# Altium PCB PCB1.PcbDoc
Units mil, origin at the board's own origin, x right, y up, seen from the top; angles counter-clockwise.
Board outline 6000 x 4000 mil, 2 copper layers (Top Layer, Bottom Layer); 85 components, 77 nets, 403 pads, 0 vias.
Unrouted connection lines stored in the file: 173.
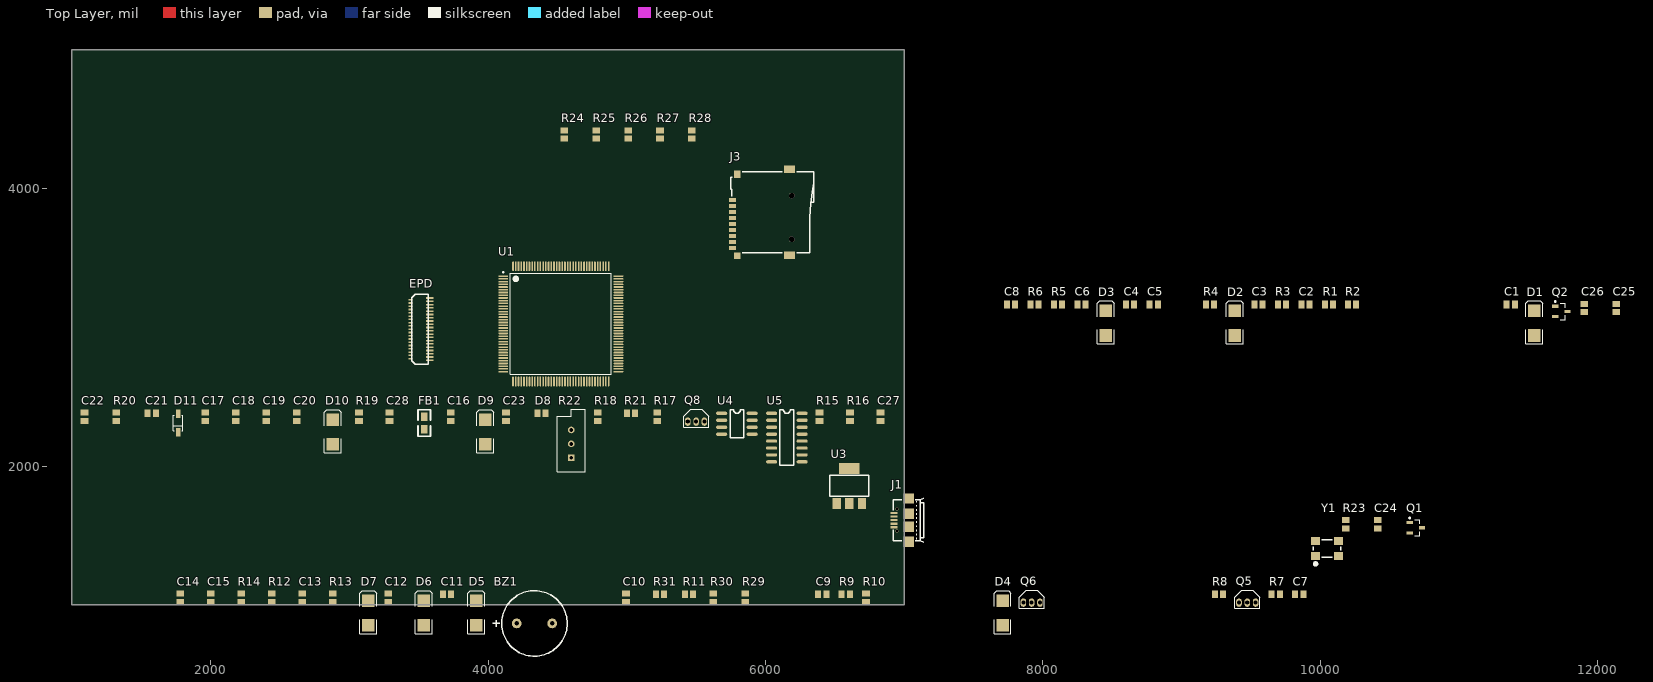
[diagram p0: Top Layer view]
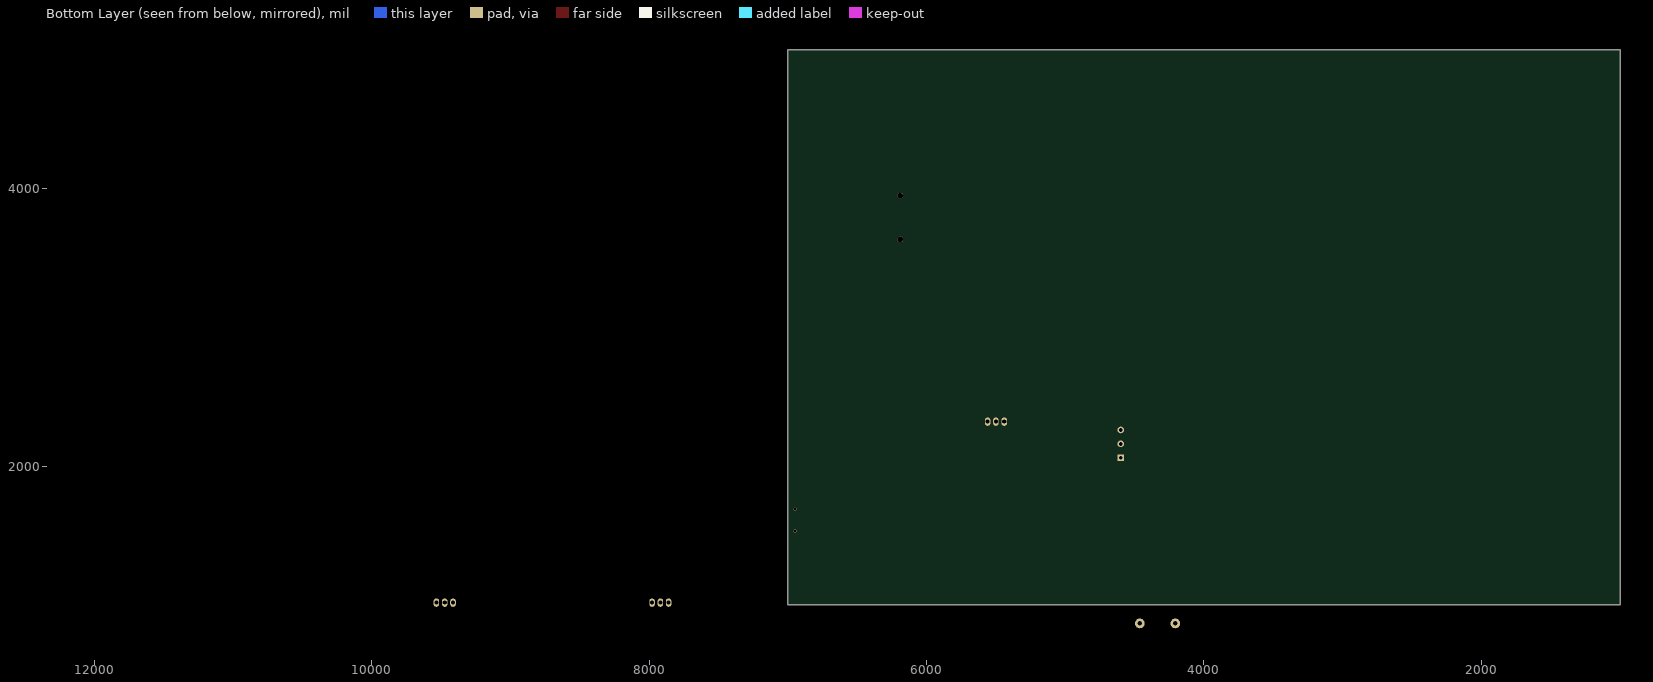
[diagram p1: Bottom Layer view, seen from below]

## Layer stack, top to bottom
Top Solder: solder mask 0.4, Solder Resist, Dk 3.5
Top Layer: signal copper 1.4
Dielectric 1: dielectric 12.6, FR-4, Dk 4.8
Bottom Layer: signal copper 1.4
Bottom Solder: solder mask 0.4, Solder Resist, Dk 3.5

## Board outline
1000,1000 7000,1000 7000,5000 1000,5000

## Design rules (kind name [scope] priority, off if disabled: settings)
Clearance [All] p1: gap=10 ignorepadtopadclearanceinfootprint=FALSE except(0: Arc-Hole Track-Hole SMDPad-Hole THPad-Hole Via-Hole Fill-Hole Poly-Hole Region-Hole Text-Hole)
PolygonConnect [All] p1: connectstyle=Relief reliefconductorwidth=10 reliefentries=4 polygonreliefangle="90 Angle" airgapwidth=10
RoutingVias [All] p1: holewidth=28 width=50 viastyle="Through Hole" minholewidth=28 minwidth=50 maxholewidth=28 maxwidth=50
SolderMaskExpansion [All] p1: expansion=4
Width [All] p1: maxlimit=10 minlimit=10 preferedwidth=10
30 further rules are at their usual default settings.

## Components (designator, comment, footprint, x,y, rotation, side; value= is the part's Value field where it differs from the comment)
BZ1 "BUZZER" BUZZER-D12.0X8.5-6.5-0.8 4335,865 r0 top
C1 "20pF" C0805 11375,3165 r0 top value=220pF
C2 "1uF" C0805 9895,3165 r0 top value=220pF
C3 "0.01uF" C0805 9555,3165 r0 top value=220pF
C4 "1uF" C0805 8630,3165 r0 top value=220pF
C5 "10uF" C0805 8800,3165 r0 top value=220pF
C6 "0.01uF" C0805 8280,3165 r0 top value=220pF
C7 "10uF" C0805 9850,1075 r0 top value=220pF
C8 "1uF" C0805 7770,3165 r0 top value=220pF
C9 "1uF" C0805 6410,1075 r0 top value=220pF
C10 "0.01uF" C0805 4995,1050 r90 top value=220pF
C11 "1uF" C0805 3705,1075 r0 top value=220pF
C12 "10uF" C0805 3280,1050 r90 top
C13 "220pF" C0805 2660,1050 r90 top
C14 "104" C0805 1780,1050 r90 top value=220pF
C15 "10uF" C0805 2000,1050 r90 top value=220pF
C16 "1uF" C0805 3730,2355 r90 top value=220pF
C17 "10uF" C0805 1960,2355 r90 top value=220pF
C18 "104" C0805 2180,2355 r90 top value=220pF
C19 "104" C0805 2400,2355 r90 top value=220pF
C20 "10uF" C0805 2620,2355 r90 top value=220pF
C21 "104" C0805 1575,2380 r0 top value=220pF
C22 "20pF" C0805 1090,2355 r90 top value=220pF
C23 "10uF" C0805 4130,2355 r90 top value=220pF
C24 "20pF" C0805 10415,1580 r90 top
C25 "20pF" C0805 12135,3140 r90 top
C26 "104" C0805 11905,3140 r90 top
C27 "104" C0805 6830,2355 r90 top value=220pF
C28 "104" C0805 3290,2355 r90 top
D1 "MBR0530" SMB 11545,3030 r90 top
D2 "MBR0530" SMB 9385,3030 r90 top
D3 "MBR0530" SMB 8455,3030 r90 top
D4 "MBR0530" SMB 7710,940 r90 top
D5 "MBR0530" SMB 3915,940 r90 top
D6 "ES2x" SMB 3535,940 r90 top
D7 "MBR0530" SMB 3135,940 r90 top
D8 "Green" C0805 4385,2380 r0 top
D9 "MBR0530" SMB 3980,2245 r90 top
D10 "MBR0530" SMB 2880,2245 r90 top
D11 "1N4148" 425 1765,2310 r90 top
EPD "BT" "39FXL - duplicate" 3580,2762.4 r90 top
FB1 "100uH" 0805 3540,2265 r90 top
J1 "MICRO USB CONNECTOR TYPEB" "MICRO USB CONNECTOR TYPEB-ST-MC-5F-01" 7090,1610 r90 top
J3 "MICRO SD CARD CONNECTOR" "MICRO SD CARD CONNECTOR" 6347.48,3829.92 r90 top
Q1 "PNP" SOT-23B_N 10690,1555 r0 top
Q2 "QNPN" SOT-23B_N 11740,3115 r0 top
Q5 "MMBT3904" TO-92B 9425,1015 r0 top
Q6 "MMBT3904" TO-92B 7870,1015 r0 top
Q8 "MMBT3904" TO-92B 5450,2320 r0 top
R1 "1M" C0805 10065,3165 r0 top
R2 "10K" C0805 10230,3165 r0 top
R3 "57.6K" C0805 9725,3165 r0 top
R4 "100K" C0805 9205,3165 r0 top
R5 "100K" C0805 8110,3165 r0 top
R6 "100K" C0805 7940,3165 r0 top
R7 "100K" C0805 9680,1075 r0 top
R8 "10K" C0805 9270,1075 r0 top
R9 "1M" C0805 6580,1075 r0 top
R10 "80.6K" C0805 6725,1050 r90 top
R11 "100K" C0805 5450,1075 r0 top
R12 "3k/1%" C0805 2440,1050 r90 top
R13 "10K/1%" C0805 2880,1050 r90 top
R14 "100K" C0805 2220,1050 r90 top
R15 "51R/1%" C0805 6390,2355 r90 top
R16 "10K/1%" C0805 6610,2355 r90 top
R17 "10K" C0805 5220,2355 r90 top
R18 "10K" C0805 4790,2355 r90 top
R19 "100K" C0805 3070,2355 r90 top
R20 "10K" C0805 1320,2355 r90 top
R21 "10R" C0805 5030,2380 r0 top
R22 "RPot" VR5 4600,2160 r90 top value=10K
R23 "10K" C0805 10185,1580 r90 top
R24 "47K" C0805 4550,4390 r90 top
R25 "47K" C0805 4780,4390 r90 top
R26 "47K" C0805 5010,4390 r90 top
R27 "47K" C0805 5240,4390 r90 top
R28 "47K" C0805 5470,4390 r90 top
R29 "0R" C0805 5855,1050 r90 top
R30 "22R" C0805 5625,1050 r90 top
R31 "22R" C0805 5240,1075 r0 top
U1 "STM32F407ZGT6" STM-LQFP144_N 4525,3025 r0 top
U3 "1117B" SOT-223 6514.45,1730 r0 top
U4 "LF353H(8)" SO-8 5685,2380 r0 top
U5 "CD4053" SO-16 6045,2380 r0 top
Y1 "25M" XTAL-5.0X3.2 10050,1405 r90 top

## Footprints (in the part's own frame and the unit in brackets; to place one, negate y for a bottom-side part, rotate by r counter-clockwise, add the part's x,y. Pads: shape width x height; smd on the part's side, far side on the other; paste and mask are expansions set on the pad)
"39FXL - duplicate" [mm]
  rect 0.3x1.35 smd: 1(0,0) 3(0.6,0) 5(1.2,0) 7(1.8,0) 9(2.4,0) 11(3,0) 13(3.6,0) 15(4.2,0) 17(4.8,0) 19(5.4,0) 21(6,0) 23(6.6,0) 25(7.2,0) 27(7.8,0) 29(8.4,0) 31(9,0) 33(9.6,0) 35(10.2,0) 37(10.8,0) 39(11.4,0)
  rect 0.3x0.75 smd: 1(0,0) 2(0.3,3.556) 2(0.3,3.556) 4(0.9,3.556) 6(1.5,3.556) 8(2.1,3.556) 10(2.7,3.556) 12(3.3,3.556) 14(3.9,3.556) 16(4.5,3.556) 18(5.1,3.556) 20(5.7,3.556) 22(6.3,3.556) 24(6.9,3.556) 26(7.5,3.556) 28(8.1,3.556) 30(8.7,3.556) 32(9.3,3.556) 34(9.9,3.556) 36(10.5,3.556) 38(11.1,3.556)
  silkscreen extent -0.76,0.25 12.06,3.3, body extent -1.15,0.27 12.55,3.28, height 0.9
425 [mm] "SOD-123; 2 Leads; Body 2.7 x 1.6 mm, (LxW)"
  rect 1.6x0.85 smd: 1(-1.7,0) 2(1.7,0)
  silkscreen extent -1.45,-0.9 1.45,0.9
0805 [mil]
  rect 60x50 smd: 1(0,0) 2(90,0)
  silkscreen extent -50,-45 140,45
BUZZER-D12.0X8.5-6.5-0.8 [mil] "Buzzer"
  round 70 hole 31.5: 1(-127.95,0) 2(127.95,0)
  silkscreen extent -299,-236 236,236, body extent -236,-236 236,236, height 339
C0805 [mm] "Chip Capacitor, Body 2.0x1.3mm, IPC High Density"
  rect 1.1x1.4 smd: 1(-0.75,0) 2(0.75,0)
  body extent -1.1,-0.72 1.1,0.72, height 1.4
"MICRO SD CARD CONNECTOR" [mm] "Micro SD Card Connector"
  round 1 hole 1 unplated: 0(-4.95,4) 0(3.05,4)
  rect 0.8x1.27 smd: 1(2.25,14.865) 2(1.15,14.865) 3(0.05,14.865) 4(-1.05,14.865) 5(-2.15,14.865) 6(-3.25,14.865) 7(-4.35,14.865) 8(-5.45,14.865) 9(-6.55,14.865)
  rect 1.2x1.2 smd: 10(-7.95,14)
  rect 1.4x1.2 smd: 11(6.95,14)
  rect 1.4x2 smd: 12(-7.85,4.4) 13(7.85,4.4)
  silkscreen extent -7.4,0 7.4,15.2, body extent -8.05,0 7.95,15.25, height 1.92
"MICRO USB CONNECTOR TYPEB-ST-MC-5F-01" [mm] "Micro USB Connector, Type B, ST-MC-5F-01"
  round 0.55 hole 0.55 unplated: 0(-2,3.6) 0(2,3.6)
  rect 0.4x1.35 smd: 1(-1.3,4.125) 2(-0.65,4.125) 3(0,4.125) 4(0.65,4.125) 5(1.3,4.125)
  rect 1.9x1.9 smd: 6(-3.95,1.45) 7(3.95,1.45) 8(-1.2,1.45) 9(1.2,1.45)
  silkscreen extent -4.05,-1.33 4.05,4.3, body extent -3.99,-1.13 3.99,4.3, height 2.72
SMB [mm] "DO-214-AA/SMB; 2 C-Bend Leads; Body 5.3 x 3.6 mm, inc. leads (LxW)"
  rect 2.3x2.3 smd: 1(-2.25,0) 2(2.25,0)
  silkscreen extent -3.8,-1.55 4.1,1.55
SO-8 [mil]
  oval 80x24 smd: 1(0,0) 2(0,-50) 3(0,-100) 4(0,-150) 5(220,-150) 6(220,-100) 7(220,-50) 8(220,0)
  silkscreen extent 60,-175 160,25
SO-16 [mil]
  oval 80x24 smd: 1(0,0) 2(0,-50) 3(0,-100) 4(0,-150) 5(0,-200) 6(0,-250) 7(0,-300) 8(0,-350) 9(220,-350) 10(220,-300) 11(220,-250) 12(220,-200) 13(220,-150) 14(220,-100) 15(220,-50) 16(220,0)
  silkscreen extent 60,-375 160,25
SOT-23B_N [mm] "SOT23, 3-Leads, Body 2.9x1.3mm, Pitch 0.95mm, Lead Span 2.4mm, IPC Medium Density"
  rect 1.15x0.6 smd: 1(-1.125,0.95) 2(-1.125,-0.95) 3(1.125,0)
  silkscreen extent -1.25,-1.5 0.7,1.92, body extent -0.7,-1.5 0.7,1.5, height 1.14
SOT-223 [mil]
  rect 59x79 smd: 1(0,0) 2(90.55,0) 3(181.1,0)
  rect 150x79 smd: 2(89.88,253.54)
  silkscreen extent -49,52 231,202
STM-LQFP144_N [mm] "Thin QFP, 144-Leads, Body 20x20mm, Pitch 0.5mm, IPC Medium Density"
  oval 1.8x0.3 smd: 1(-10.55,8.75) 2(-10.55,8.25) 3(-10.55,7.75) 4(-10.55,7.25) 5(-10.55,6.75) 6(-10.55,6.25) 7(-10.55,5.75) 8(-10.55,5.25) 9(-10.55,4.75) 10(-10.55,4.25) 11(-10.55,3.75) 12(-10.55,3.25) 13(-10.55,2.75) 14(-10.55,2.25) 15(-10.55,1.75) 16(-10.55,1.25) 17(-10.55,0.75) 18(-10.55,0.25) 19(-10.55,-0.25) 20(-10.55,-0.75) 21(-10.55,-1.25) 22(-10.55,-1.75) 23(-10.55,-2.25) 24(-10.55,-2.75) 25(-10.55,-3.25) 26(-10.55,-3.75) 27(-10.55,-4.25) 28(-10.55,-4.75) 29(-10.55,-5.25) 30(-10.55,-5.75) 31(-10.55,-6.25) 32(-10.55,-6.75) 33(-10.55,-7.25) 34(-10.55,-7.75) 35(-10.55,-8.25) 36(-10.55,-8.75) 73(10.55,-8.75) 74(10.55,-8.25) 75(10.55,-7.75) 76(10.55,-7.25) 77(10.55,-6.75) 78(10.55,-6.25) 79(10.55,-5.75) 80(10.55,-5.25) 81(10.55,-4.75) 82(10.55,-4.25) 83(10.55,-3.75) 84(10.55,-3.25) 85(10.55,-2.75) 86(10.55,-2.25) 87(10.55,-1.75) 88(10.55,-1.25) 89(10.55,-0.75) 90(10.55,-0.25) 91(10.55,0.25) 92(10.55,0.75) 93(10.55,1.25) 94(10.55,1.75) 95(10.55,2.25) 96(10.55,2.75) 97(10.55,3.25) 98(10.55,3.75) 99(10.55,4.25) 100(10.55,4.75) 101(10.55,5.25) 102(10.55,5.75) 103(10.55,6.25) 104(10.55,6.75) 105(10.55,7.25) 106(10.55,7.75) 107(10.55,8.25) 108(10.55,8.75)
  oval 0.3x1.8 smd: 37(-8.75,-10.55) 38(-8.25,-10.55) 39(-7.75,-10.55) 40(-7.25,-10.55) 41(-6.75,-10.55) 42(-6.25,-10.55) 43(-5.75,-10.55) 44(-5.25,-10.55) 45(-4.75,-10.55) 46(-4.25,-10.55) 47(-3.75,-10.55) 48(-3.25,-10.55) 49(-2.75,-10.55) 50(-2.25,-10.55) 51(-1.75,-10.55) 52(-1.25,-10.55) 53(-0.75,-10.55) 54(-0.25,-10.55) 55(0.25,-10.55) 56(0.75,-10.55) 57(1.25,-10.55) 58(1.75,-10.55) 59(2.25,-10.55) 60(2.75,-10.55) 61(3.25,-10.55) 62(3.75,-10.55) 63(4.25,-10.55) 64(4.75,-10.55) 65(5.25,-10.55) 66(5.75,-10.55) 67(6.25,-10.55) 68(6.75,-10.55) 69(7.25,-10.55) 70(7.75,-10.55) 71(8.25,-10.55) 72(8.75,-10.55) 109(8.75,10.55) 110(8.25,10.55) 111(7.75,10.55) 112(7.25,10.55) 113(6.75,10.55) 114(6.25,10.55) 115(5.75,10.55) 116(5.25,10.55) 117(4.75,10.55) 118(4.25,10.55) 119(3.75,10.55) 120(3.25,10.55) 121(2.75,10.55) 122(2.25,10.55) 123(1.75,10.55) 124(1.25,10.55) 125(0.75,10.55) 126(0.25,10.55) 127(-0.25,10.55) 128(-0.75,10.55) 129(-1.25,10.55) 130(-1.75,10.55) 131(-2.25,10.55) 132(-2.75,10.55) 133(-3.25,10.55) 134(-3.75,10.55) 135(-4.25,10.55) 136(-4.75,10.55) 137(-5.25,10.55) 138(-5.75,10.55) 139(-6.25,10.55) 140(-6.75,10.55) 141(-7.25,10.55) 142(-7.75,10.55) 143(-8.25,10.55) 144(-8.75,10.55)
  silkscreen extent -10.67,-9.25 9.25,9.57, body extent -10,-10 10,10, height 1.6
TO-92B [mil]
  oval 40x60 hole 30: 1(50,0) 2(-10,0) 3(110,0)
  silkscreen extent -40,-40 140,90
VR5 [mm] "Thru-Hole; 3 Leads"
  rect 1.2x1.2 hole 0.7: 1(-2.54,0)
  round 1.2 hole 0.7: 2(0,0) 3(2.54,0)
  silkscreen extent -5.08,-2.54 6.35,2.54
XTAL-5.0X3.2 [mm] "Oscillator"
  rect 1.45x1.7 smd: 1(-1.35,2.1) 2(-1.35,-2.1) 3(1.35,-2.1) 4(1.35,2.1)
  silkscreen extent -3.05,-2.5 1.6,2.5, body extent -1.6,-2.5 1.6,2.5, height 1

## Part data
BZ1: "Buzzer"
C1 C2 C3 C4 C5 C6 C7 C8 C9 C10 C11 C12 C13 C14 C15 C16 C17 C18 C19 C20 C21 C22 C23 C27 C28: library part CAP, "Capacitor"
  C1 C2 C3 C4 C5 C6 C7 C8 C9 C10 C11 C12 C13 C14 C15 C16 C17 C18 C19 C20 C21 C22 C23 C27: LatestRevisionDate=17-Jul-2002, LatestRevisionNote="Re-released for DXP Platform.", PackageReference=RAD-0.3, Published=8-Jun-2000, Publisher="Altium Limited"
C24 C25 C26: library part Cap, "Capacitor", LatestRevisionDate=17-Jul-2002, LatestRevisionNote="Re-released for DXP Platform.", PackageReference=RAD-0.3, Published=8-Jun-2000, Publisher="Altium Limited"
D1 D2 D3 D4 D5 D7 D9 D10: library part ES2x, "Diode"
D6: "Diode"
D8: library part LED2, "Typical RED, GREEN, YELLOW, AMBER GaAs LED", PackageDocument=Feb-2002, LatestRevisionDate=17-Jul-2002, LatestRevisionNote="Re-released for DXP Platform.", PackageReference=3.2X1.6X1.1, Published=8-Jun-2000, Publisher="Altium Limited"
D11: library part Diode, "Default Diode", Code_JEDEC=DO-214-AB, LatestRevisionDate=17-Jul-2002, LatestRevisionNote="Re-released for DXP Platform.", Published=8-Jun-2000, Publisher="Altium Limited"
EPD: library part ED060SC4(H2), "Connector"
FB1: library part FB, "Ferrite Bead"
J1: "USB Connector"
J3: "Micro SD Card Connector"
Q1: "PNP Bipolar Transistor", LatestRevisionDate=29-May-2009, LatestRevisionNote="IPC-7351 Footprint Added.", PackageDescription="3-Pin SOT-23 Package 0.95 mm Pitch, 2.4 mm Lead Span", PackageReference=SOT-23B, PackageVersion=Aug-1999, Published=8-Jun-2000, Publisher="Altium Limited"
Q2: "NPN Bipolar Transistor", LatestRevisionDate=29-May-2009, LatestRevisionNote="IPC-7351 Footprint Added.", PackageDescription="3-Pin SOT-23 Package 0.95 mm Pitch, 2.4 mm Lead Span", PackageReference=SOT-23B, PackageVersion=Aug-1999, Published=8-Jun-2000, Publisher="Altium Limited"
Q5 Q6 Q8: library part NPN, "NPN Transistor"
R1 R2 R3 R4 R5 R6 R7 R8 R9 R10 R11 R12 R13 R14 R15 R16 R17 R18 R19 R20 R21 R23 R24 R25 R26 R27 R28 R29 R30 R31: library part Res2, "Resistor", LatestRevisionDate=17-Jul-2002, LatestRevisionNote="Re-released for DXP Platform.", PackageReference=AXIAL-0.4, Published=8-Jun-2000, Publisher="Altium Limited"
  R24 R25 R26 R27 R28: PackageDescription="Axial Device, Thru-Hole; 2 Leads; 0.4 in Pin Spacing"
R22: "Potentiometer", LatestRevisionDate=17-Jul-2002, LatestRevisionNote="Re-released for DXP Platform.", PackageDescription="Variable Resistor, Thru-Hole; 3 Leads", PackageReference=VR5, Published=8-Jun-2000, Publisher="Altium Limited", Set Position=0.5, Sim Note="Enter the Resistance value and the set point into parameter fields."
U1: "ARM Cortex-M4 32-bit MCU+FPU, 210 DMIPS, 1024 kB Flash, 192 kB Internal RAM, 114 I/Os, 144-pin LQFP, -40 to 85 degC, Tray", I/Os (High Current)=114, Manufacturer=STMicroelectronics, Operating Frequency(F) (Processor speed) (MHz)=168, Supplier Part Number 1=497-11766-ND, Supply Voltage(Vcc) max (V)=3.6, Supply Voltage(Vcc) min (V)=1.8, ComponentLink1Description="Manufacturer URL", ComponentLink1URL=http://www.st.com/web/en/home.html, ComponentLink2Description=Datasheet, ComponentLink2URL=http://www.st.com/st-web-ui/static/active/en/resource/technical/document/datasheet/DM00037051.pdf, ComponentLink3Description="Package Specification", ComponentLink3URL=http://www.st.com/st-web-ui/static/active/en/resource/technical/document/datasheet/DM00037051.pdf, Core="ARM Cortex-M4", D/A Converter=2x12-bit, DatasheetVersion="Rev. 4", FLASH Size (Prog) (kB)=1024, Internal RAM Size (kB)=192, Mounting Technology="Surface Mount", PackageDescription="144-Pin Low Profile Quad Flat Package, 20 x 20 mm Body, 0.5 mm Pitch", PackageReference=LQFP144, PackageVersion="Rev. 4, 06/2013", Packing=Tray, PartNumber=STM32F407ZGT6, Supplier 1=Digi-Key, Supplier 2=Newark, Supplier 3=Mouser, Supplier Part Number 2=73T2334, Supplier Part Number 3=511-STM32F407ZGT6
U4: "Fast Settling Dual Operational Amplifier", Text Field1=pristel=Nsc\nsanopea\<parttype>.ckt
U5: library part 4053
Y1: library part XTAL, "Crystal Oscillator", LatestRevisionDate=17-Jul-2002, LatestRevisionNote="Re-released for DXP Platform.", PackageReference=R38, Published=8-Jun-2000, Publisher="Altium Limited"

## Nets (pads, with @x,y where several pads share a name; then routed paths per layer and width w, separated by ;. In a path a pad name is that pad's centre, name@x,y a point inside that pad or via, vN(x,y) a via of type N, cw(c..) or ccw(c..) an arc to the next point about the centre after c; other vN are vias at no path point)
+15: C27.1 U4.8
+15V: C14.1 C15.1 EPD.2 Q6.3 R10.1 R14.1
+22V: C7.1 C8.1 EPD.23 R6.1
-15: C27.2 R22.2 U4.4
-15V: C19.1 C20.1 D9.2 EPD.1 R2.1 R19.2
-20V: C4.1 C5.1 D2.1 EPD.24 R4.1
DS3231_CE: 
DS3231_INT: 
"EPD CKV": EPD.33 EPD.38
"EPD CL": EPD.5
"EPD D0": EPD.12
"EPD D1": EPD.13
"EPD D2": EPD.14
"EPD D3": EPD.15
"EPD D4": EPD.16
"EPD D5": EPD.17
"EPD D6": EPD.18
"EPD D7": EPD.19
"EPD GM1": EPD.28
"EPD GM2": EPD.27
"EPD LE": EPD.6
"EPD OC": EPD.7
"EPD RL": EPD.29
"EPD SHR": EPD.8
"EPD SPH": EPD.11
"EPD SPV": EPD.32 EPD.37
GND: C2.2 C3.2 C4.2 C5.2 C7.2 C8.2 C9.2 C10.2 C12.1 C14.2 C15.2 C17.2 C18.2 C19.2 C20.2 C21.2 C23.2 C24.2 C25.2 C26.1 C28.2 D7.1 D10.1 EPD.3 EPD.31 EPD.34 J1.5 J1.6 J1.7 J1.8 J1.9 J3.6 J3.10 J3.11 J3.12 J3.13 Q5.2 Q8.2 R1.2 R3.2 R4.2 R6.2 R9.2 R11.2 R14.2 R15.2 R19.1 R20.2 R22.1 U1.16 U1.31 U1.38 U1.51 U1.61 U1.83 U1.94 U1.107 U1.120 U1.130 U3.1 U5.1 U5.2 U5.3 U5.5 U5.6 U5.8 U5.9 U5.10 U5.12
I2C_SCL: 
I2C_SDA: 
NetBT1_1: D11.1
NetC1_1: C1.1 C6.1 C11.1 C16.1 FB1.2
NetC1_2: C1.2 D1.1 D2.2
NetC3_1: C3.1 R2.2 R3.1
NetC6_2: C6.2 D3.1 D4.2
NetC9_1: C9.1 D4.1 Q6.2 R9.1
NetC10_1: C10.1 Q6.1 R10.2 R11.1
NetC11_2: C11.2 D5.1 D7.2
NetC12_2: C12.2 C13.1 D5.2 R12.1 R13.1
NetC13_2: C13.2 R12.2 R15.1
NetC16_2: C16.2 D9.1 D10.2
NetC23_1: C23.1 R21.2 U5.13
NetD3_2: D3.2 R5.1
NetD11_2: D11.2
NetJ1_2: J1.2 R31.2
NetJ1_3: J1.3 R30.2
NetJ1_4: J1.4 R29.2
NetQ4_1: R5.2 R7.2
NetQ5_1: Q5.1 R8.2
NetQ5_3: Q5.3 R7.1
NetQ7_1: R13.2 R16.2
NetQ8_1: Q8.1 R18.2
NetQ8_3: Q8.3 R16.1
NetR21_1: R21.1 U4.1 U4.2
NetR22_3: R22.3 U4.3
NRST: C26.2 R23.1
OCS_IN: C24.1 Y1.2
OCS_OUT: C25.1 Y1.1
PEN1: C21.1 R20.1
PEN2: R18.1
PEN3: R8.1
PEN4: U5.11
"SD DET": J3.9
"SDIO CK": J3.5 R26.1
"SDIO CMD": J3.3
"SDIO D0": J3.7 R25.1
"SDIO D1": J3.8 R24.1
"SDIO D2": J3.1 R28.1
"SDIO D3": J3.2 R27.1
"USB D+": R30.1
"USB D-": R31.1
"USB ID": R29.1
VCC: U5.16
VCC3.3: C28.1 R23.2
VCC3.3v: EPD.4 EPD.30 EPD.35 EPD.36 J3.4 R24.2 R25.2 R26.2 R27.2 R28.2 U1.17 U1.30 U1.33 U1.39 U1.52 U1.62 U1.72 U1.84 U1.95 U1.108 U1.121 U1.131 U1.144 U3.2
VCC5.0v: C17.1 C18.1 FB1.1 J1.1 U3.3
VCOM: EPD.22 U5.14
VEE: C2.1 D1.2 R1.1 U5.7
pads on no net: BZ1.1 BZ1.2 C22.1 C22.2 D6.1 D6.2 D8.1 D8.2 EPD.9 EPD.10 EPD.20 EPD.21 EPD.25 EPD.26 EPD.39 J1.0 J3.0 Q1.1 Q1.2 Q1.3 Q2.1 Q2.2 Q2.3 R17.1 R17.2 U1.1 U1.2 U1.3 U1.4 U1.5 U1.6 U1.7 U1.8 U1.9 U1.10 U1.11 U1.12 U1.13 U1.14 U1.15 U1.18 U1.19 U1.20 U1.21 U1.22 U1.23 U1.24 U1.25 U1.26 U1.27 U1.28 U1.29 U1.32 U1.34 U1.35 U1.36 U1.37 U1.40 U1.41 U1.42 U1.43 U1.44 U1.45 U1.46 U1.47 U1.48 U1.49 U1.50 U1.53 U1.54 U1.55 U1.56 U1.57 U1.58 U1.59 U1.60 U1.63 U1.64 U1.65 U1.66 U1.67 U1.68 U1.69 U1.70 U1.71 U1.73 U1.74 U1.75 U1.76 U1.77 U1.78 U1.79 U1.80 U1.81 U1.82 U1.85 U1.86 U1.87 U1.88 U1.89 U1.90 U1.91 U1.92 U1.93 U1.96 U1.97 U1.98 U1.99 U1.100 U1.101 U1.102 U1.103 U1.104 U1.105 U1.106 U1.109 U1.110 U1.111 U1.112 U1.113 U1.114 U1.115 U1.116 U1.117 U1.118 U1.119 U1.122 U1.123 U1.124 U1.125 U1.126 U1.127 U1.128 U1.129 U1.132 U1.133 U1.134 U1.135 U1.136 U1.137 U1.138 U1.139 U1.140 U1.141 U1.142 U1.143 U4.5 U4.6 U4.7 U5.4 U5.15 Y1.3 Y1.4